# Altium PCB LMH2121.PcbDoc
Units mil, origin at the board's own origin, x right, y up, seen from the top; angles counter-clockwise.
Board outline 517 x 695 mil, 4 copper layers (Top Layer, Layer 1, Layer 2, Bottom Layer), stack 23.756 mil thick; 11 components, 5 nets, 28 pads, 82 vias.
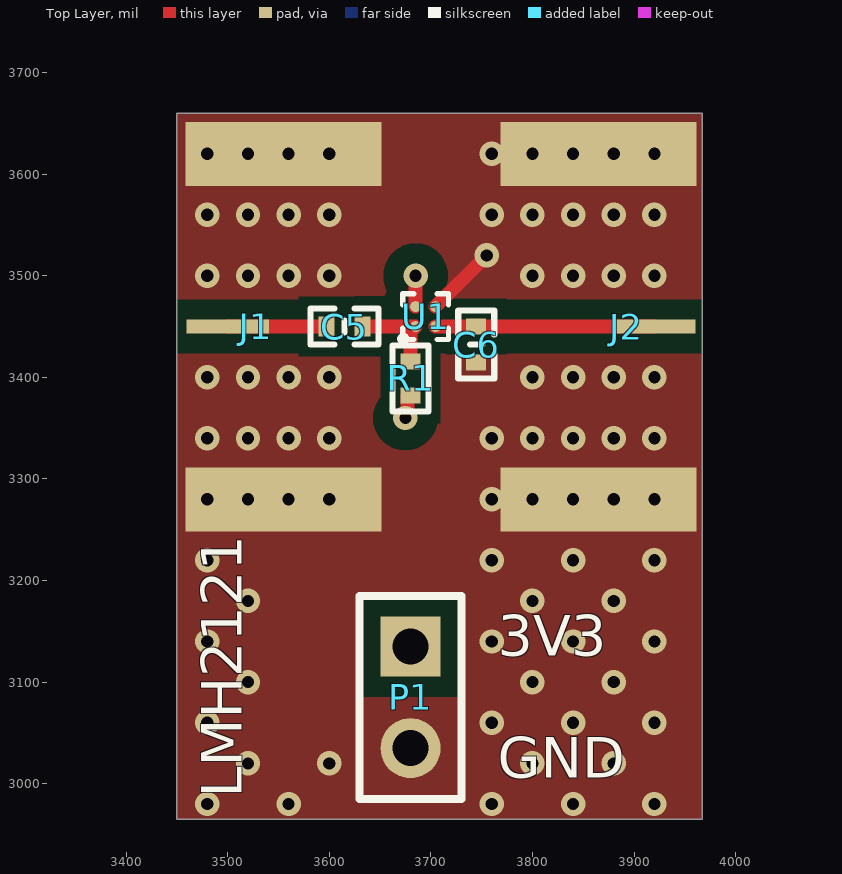
[diagram p0: Top Layer view]
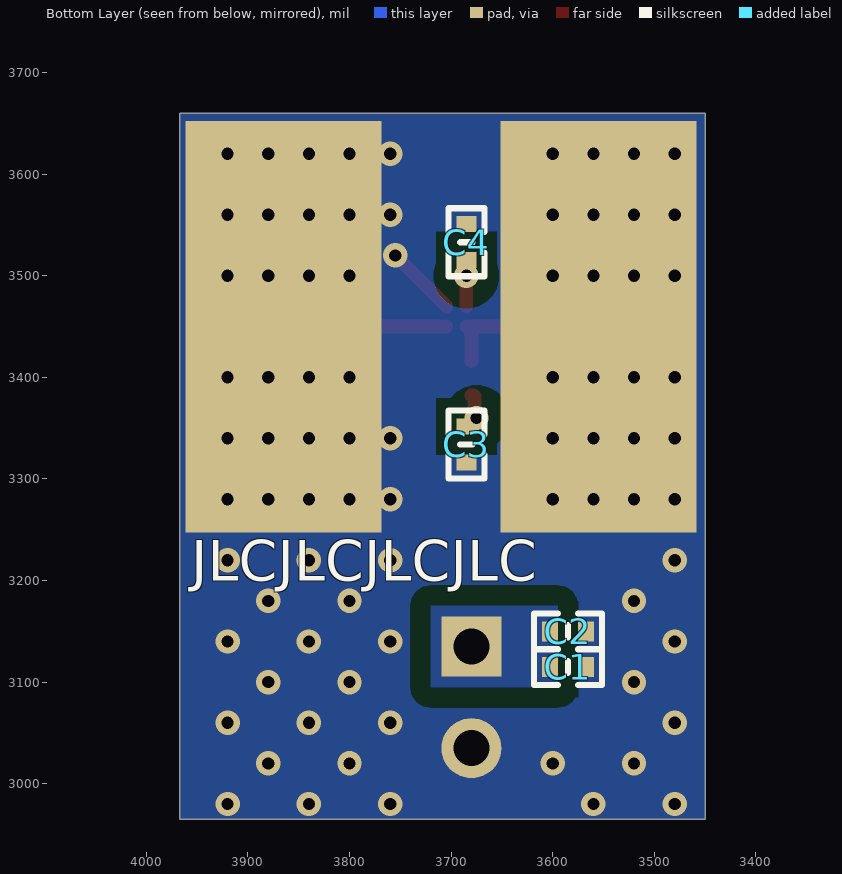
[diagram p1: Bottom Layer view, seen from below]
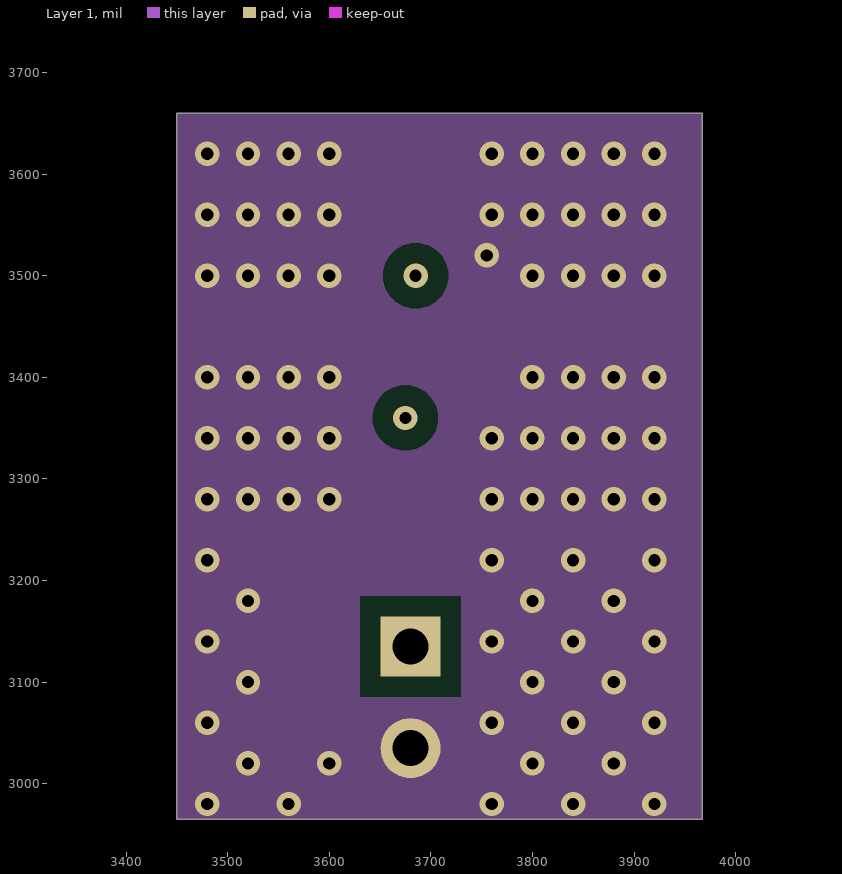
[diagram p2: Layer 1]
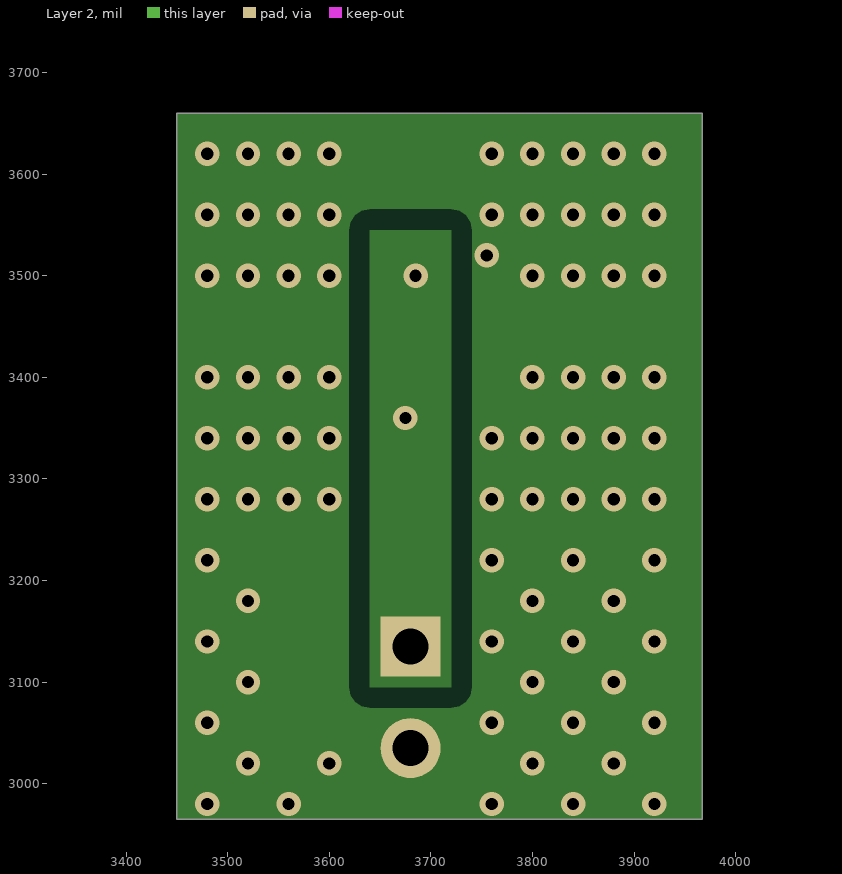
[diagram p3: Layer 2]

## Layer stack, top to bottom
Top Solder: solder mask 0.4, Solder Resist, Dk 3.5
Top Layer: signal copper 1.4
Dielectric 2: prepreg 2.8, PP-006, Dk 4.1
Layer 1: signal copper 1.378
Dielectric 1: dielectric 12.6, FR-4, Dk 4.8
Layer 2: signal copper 1.378
Dielectric 3: prepreg 2.8, PP-006, Dk 4.1
Bottom Layer: signal copper 1.4
Bottom Solder: solder mask 0.4, Solder Resist, Dk 3.5

## Board outline
3450,2965 3967,2965 3967,3660 3450,3660

## Design rules (kind name [scope] priority, off if disabled: settings)
Clearance [All] p1: gap=20 ignorepadtopadclearanceinfootprint=TRUE except(5: Arc-Arc Arc-Track Arc-SMDPad Arc-THPad Arc-Via Arc-Text Arc-Hole Track-Track Track-SMDPad Track-THPad Track-Via Track-Text Track-Hole SMDPad-SMDPad SMDPad-THPad SMDPad-Via SMDPad-Text SMDPad-Hole THPad-THPad THPad-Via THPad-Text THPad-Hole Via-Via Via-Text Via-Hole Text-Text Text-Hole)
PlaneConnect [All] p1: planeconnectstyle=Direct reliefexpansion=20 reliefentries=4 reliefconductorwidth=10 reliefairgap=10
PolygonConnect [All] p1: connectstyle=Direct reliefconductorwidth=10 reliefentries=4 polygonreliefangle="90 Angle" airgapwidth=10
RoutingVias [All] p1: holewidth=28 width=50 viastyle="Through Hole" minholewidth=28 minwidth=50 maxholewidth=28 maxwidth=50
SolderMaskExpansion [All] p1: expansion=4 istentingtop=FALSE
Width [All] p1: maxlimit=20 minlimit=10 preferedwidth=13.48
29 further rules are at their usual default settings.

## Components (designator, comment, footprint, x,y, rotation, side; value= is the part's Value field where it differs from the comment)
C1 "100nF" "C 0402_L" 3585,3115 r0 bottom
C2 "100nF" "C 0402_L" 3585,3150 r0 bottom
C3 "100nF" "C 0402_L" 3685,3334 r90 bottom
C4 "100nF" "C 0402_L" 3685,3533 r270 bottom
C5 "100pF" "C 0402_L" 3615,3450 r0 top
C6 "10pF" "C 0402_L" 3744.68,3432.28 r90 top
J1 "132414" CONN_132414_AMP 3355,3450 r90 top
J2 "132414" CONN_132414_AMP 4065,3450 r270 top
P1 "Header 2" HDR1X2 3680,3135 r270 top
R1 "1K" "R 0402_L" 3680,3400 r270 top
U1 "LMH2121" BGA4N50P2X2_88X88X50N 3694.68,3459.68 r0 top

## Footprints (in the part's own frame and the unit in brackets; to place one, negate y for a bottom-side part, rotate by r counter-clockwise, add the part's x,y. Pads: shape width x height; smd on the part's side, far side on the other; paste and mask are expansions set on the pad)
BGA4N50P2X2_88X88X50N [mm]
  round 0.27 smd: A1(-0.246,-0.246) A2(-0.246,0.254) B1(0.254,-0.246) B2(0.254,0.254)
  silkscreen extent -0.6,-0.6 0.57,0.57, body extent -0.44,-0.44 0.45,0.45, height 0.67
"C 0402_L" [mm] "无极性贴片电容"
  rect 0.4x0.5 smd: 1(-0.45,0) 2(0.45,0)
  silkscreen extent -0.85,-0.45 0.85,0.45, body extent -0.5,-0.26 0.5,0.26, height 0.53
CONN_132414_AMP [mil]
  rect 13.48x81 smd paste+0 mask+0: 1(0,-145)
  rect 63x193 smd mask+0: 2(-170,-200) 3(170,-200)
  rect 405x193 smd far side mask+0: 4(0,-200)
  body extent -188,-292 188,270, height 162
HDR1X2 [mm] "Connector; Header; 2 Position"
  rect 1.5x1.5 hole 0.9: 1(0,0)
  round 1.5 hole 0.9: 2(2.54,0)
  silkscreen extent -1.27,-1.27 3.81,1.27
"R 0402_L" [mm] "1/16W贴片电阻 https://item.taobao.com/item.htm?ft=t&id=613637044352"
  rect 0.4x0.5 smd: 1(-0.4,0) 2(0.45,0)
  silkscreen extent -0.8,-0.45 0.85,0.45, body extent -0.5,-0.25 0.5,0.25, height 0.3

## Part data
C1 C2 C3 C4 C5 C6: library part C, "贴片电容", BOM名称=贴片电容, 下单链接=https://item.taobao.com/item.htm?ft=t&id=613637044352, 淘宝ID=小糖豆的小窝窝
J1 J2: "No Description Available", Mfr_Name="Amphenol ICC", Copyright="Copyright (C) 2022 Ultra Librarian. All rights reserved.", Manufacturer_Part_Number=132414, RefDes=RefDes, Type=DEV
P1: "Header, 2-Pin", LatestRevisionDate=17-Jul-2002, LatestRevisionNote="Re-released for DXP Platform.", Publisher="Altium Limited"
R1: library part R, "贴片电阻", BOM名称=贴片电阻, 下单链接=https://item.taobao.com/item.htm?ft=t&id=613637044352, 淘宝ID=小糖豆的小窝窝
U1: "3 GHz Fast-Responding Linear Power Detector with 40 dB Dynamic Range"

## Via types
v1: diameter 24, hole 12, Top Layer to Bottom Layer, tented both sides, 82 vias

## Nets (pads, with @x,y where several pads share a name; then routed paths per layer and width w, separated by ;. In a path a pad name is that pad's centre, name@x,y a point inside that pad or via, vN(x,y) a via of type N, cw(c..) or ccw(c..) an arc to the next point about the centre after c; other vN are vias at no path point)
3.3V: C1.2 C2.2 C3.2 C4.2 P1.1 R1.2 U1.A2 | length 55.8
  Top Layer w13.48: v1(3675,3360) 3677.01,3362.01 3677.01,3381.15 3678.15,3382.29 R1.2 ; U1.A2 v1(3685,3500)
GND: C1.1 C2.1 C3.1 C4.1 C6.1 J1.2 J1.3 J1.4 J2.2 J2.3 J2.4 P1.2 U1.B2 | length 71.2
  Top Layer w13.48: U1.B2 v1(3755,3520)
  other v1: 3480,2980 3560,2980 3760,2980 3840,2980 3920,2980 3520,3020 3600,3020 3800,3020 3880,3020 3480,3060 3760,3060 3840,3060 3920,3060 3520,3100 3800,3100 3880,3100 3480,3140 3760,3140 3840,3140 3920,3140 3520,3180 3800,3180 3880,3180 3480,3220 3760,3220 3840,3220 3920,3220 3480,3280 3520,3280 3560,3280 3600,3280 3760,3280 3800,3280 3840,3280 3880,3280 3920,3280 3480,3340 3520,3340 3560,3340 3600,3340 3760,3340 3800,3340 3840,3340 3880,3340 3920,3340 3480,3400 3520,3400 3560,3400 3600,3400 3800,3400 3840,3400 3880,3400 3920,3400 3480,3500 3520,3500 3560,3500 3600,3500 3800,3500 3840,3500 3880,3500 3920,3500 3480,3560 3520,3560 3560,3560 3600,3560 3760,3560 3800,3560 3840,3560 3880,3560 3920,3560 3480,3620 3520,3620 3560,3620 3600,3620 3760,3620 3800,3620 3840,3620 3880,3620 3920,3620
NetC5_1: C5.1 J1.1 | length 97.3
  Top Layer w13.48: J1.1 C5.1
NetC5_2: C5.2 R1.1 U1.A1 | length 88.6
  Top Layer w13.48: C5.2 U1.A1 3680,3445 R1.1
NetC6_2: C6.2 J2.1 U1.B1 | length 215.3
  Top Layer w13.48: U1.B1 C6.2 J2.1

## Polygon pours and split planes (outlines as drawn)
GND on Bottom Layer "NONET_L-01_P-001" (solid, remove dead copper, pour order 5): 3450,3660 3967,3660 3967,2965 3450,2965
3.3V on Bottom Layer "NONET_L-01_P-001" (solid, remove dead copper, pour order 0): 3595,3175 3595,3095 3655,3095 3720,3095 3720,3175 3650,3175
GND on Layer 1 "NONET_L-01_P-001" (solid, remove dead copper, pour order 1): 3450,3660 3967,3660 3967,2965 3450,2965
GND on Top Layer "NONET_L-01_P-001" (solid, remove dead copper, pour order 3): 3450,3660 3967,3660 3967,2965 3450,2965
GND on Layer 2 "NONET_L-01_P-001" (solid, remove dead copper, pour order 6): 3450,3660 3967,3660 3967,2965 3450,2965
3.3V on Layer 2 "NONET_L-01_P-001" (solid, remove dead copper, pour order 4): 3640,3545 3640,3095 3720,3095 3720,3545

## Silkscreen, mask and mechanical layers (free items; w line width, h text height)
Top Overlay:
  text "3V3" at 3766,3126 h40
  text "GND" at 3766,3006 h40
  text "LMH2121" at 3514,2986 h40 r90
Bottom Overlay:
  text "JLCJLCJLCJLC" at 3956,3200 h40
Mechanical 1:
  the board outline again, w6